# Altium PCB PCB.PcbDoc (part 1 of 2)
Units mm, origin at the board's own origin, x right, y up, seen from the top; angles counter-clockwise.
Board outline 152.4 x 101.6 mm, 4 copper layers (Top Layer, Int1 (GND), Int2 (PWR), Bottom Layer), stack 0.726 mm thick; 112 components, 91 nets, 356 pads, 55 vias.
Unrouted connection lines stored in the file: 46.
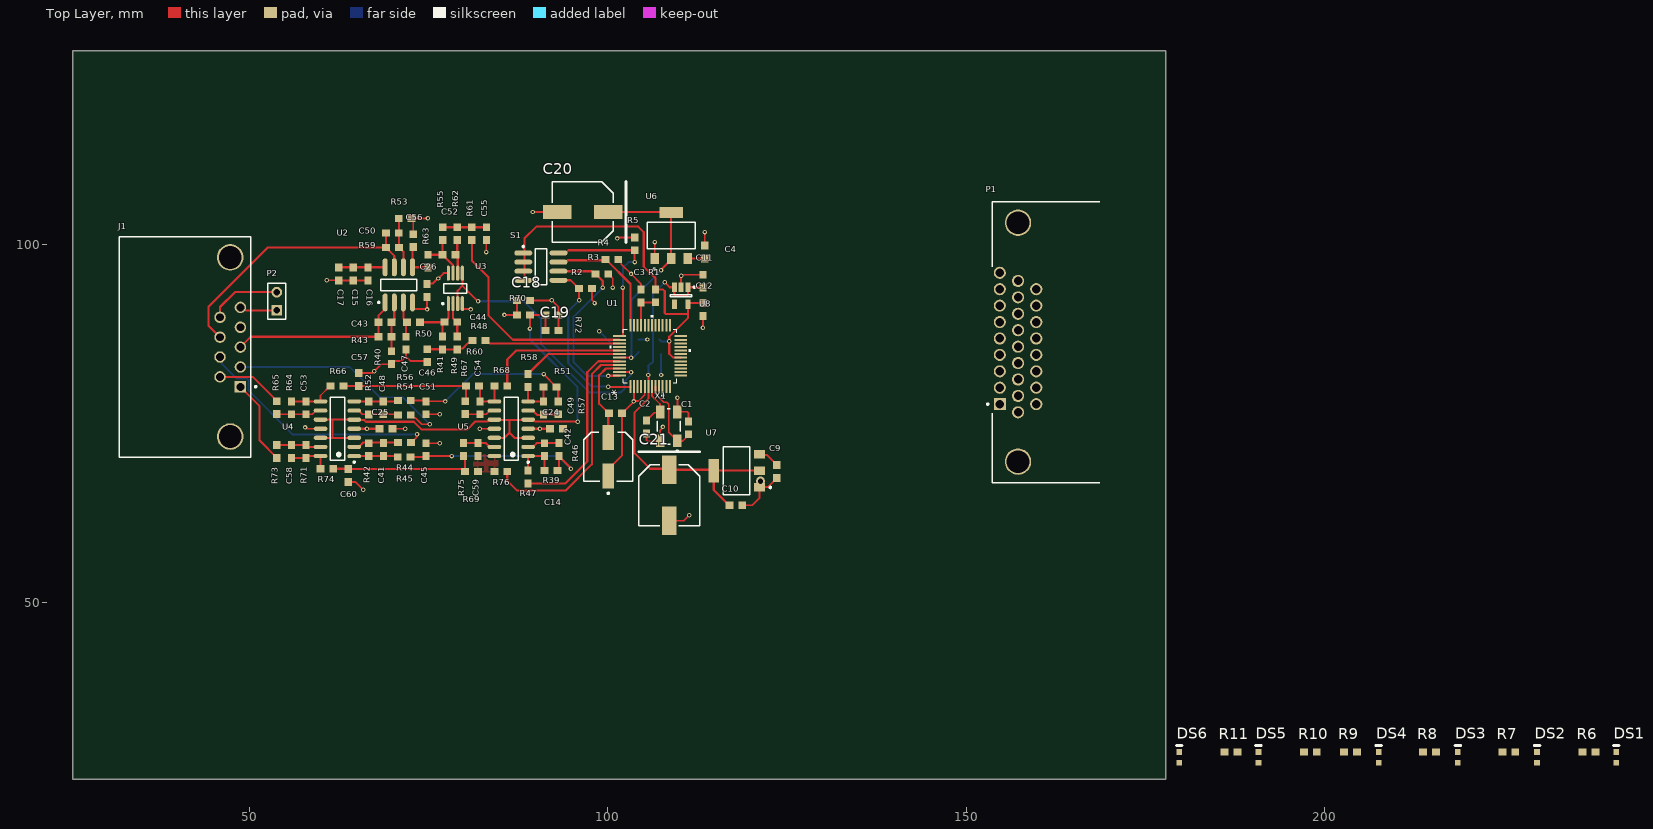
[diagram p0: Top Layer view]
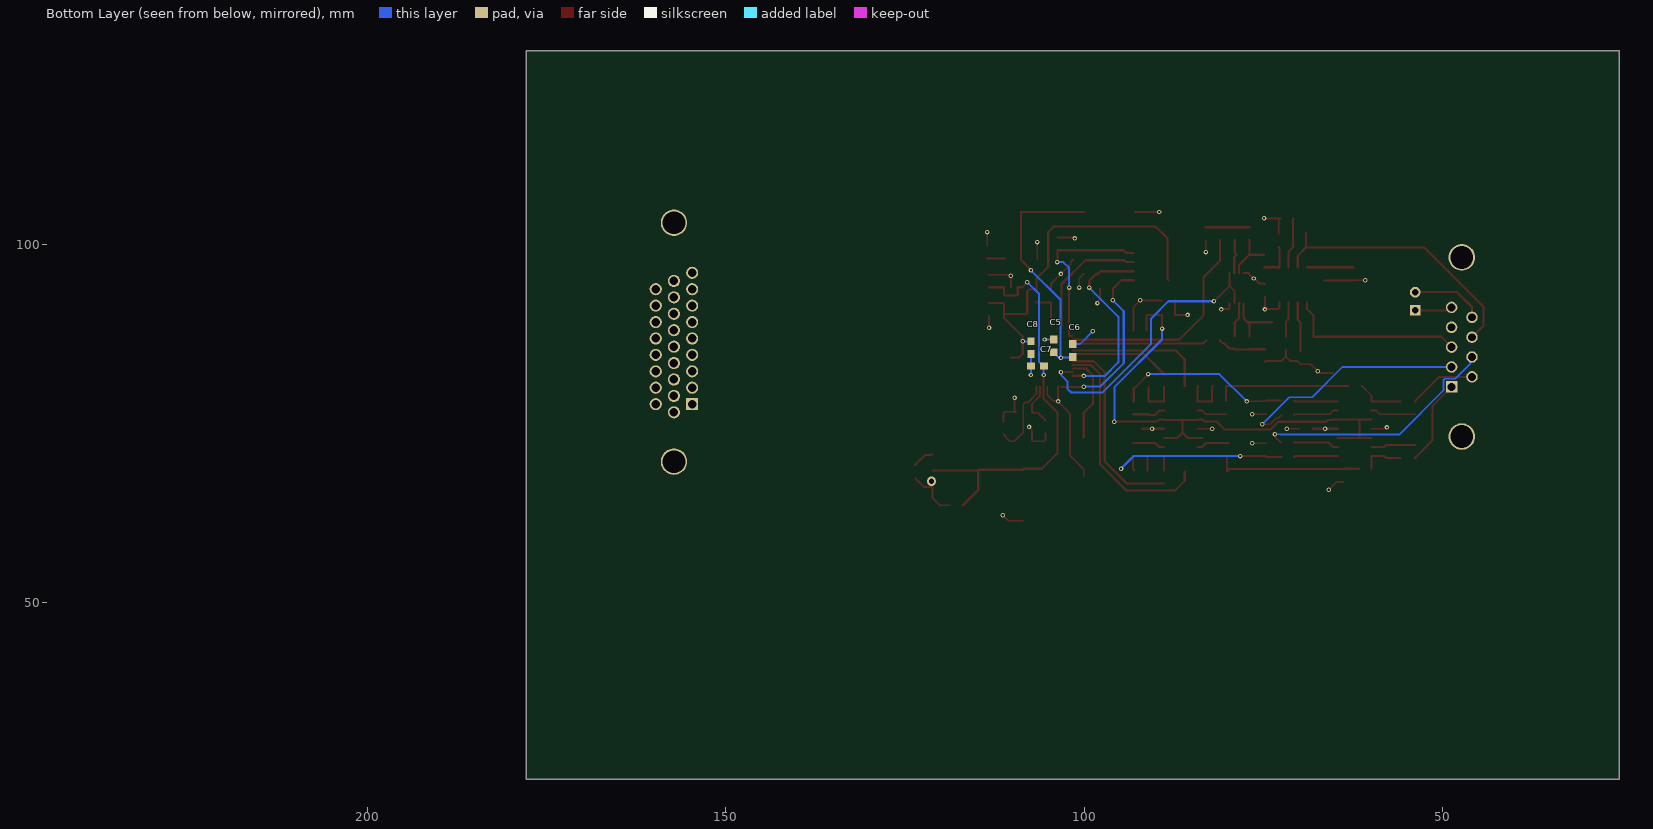
[diagram p1: Bottom Layer view, seen from below]
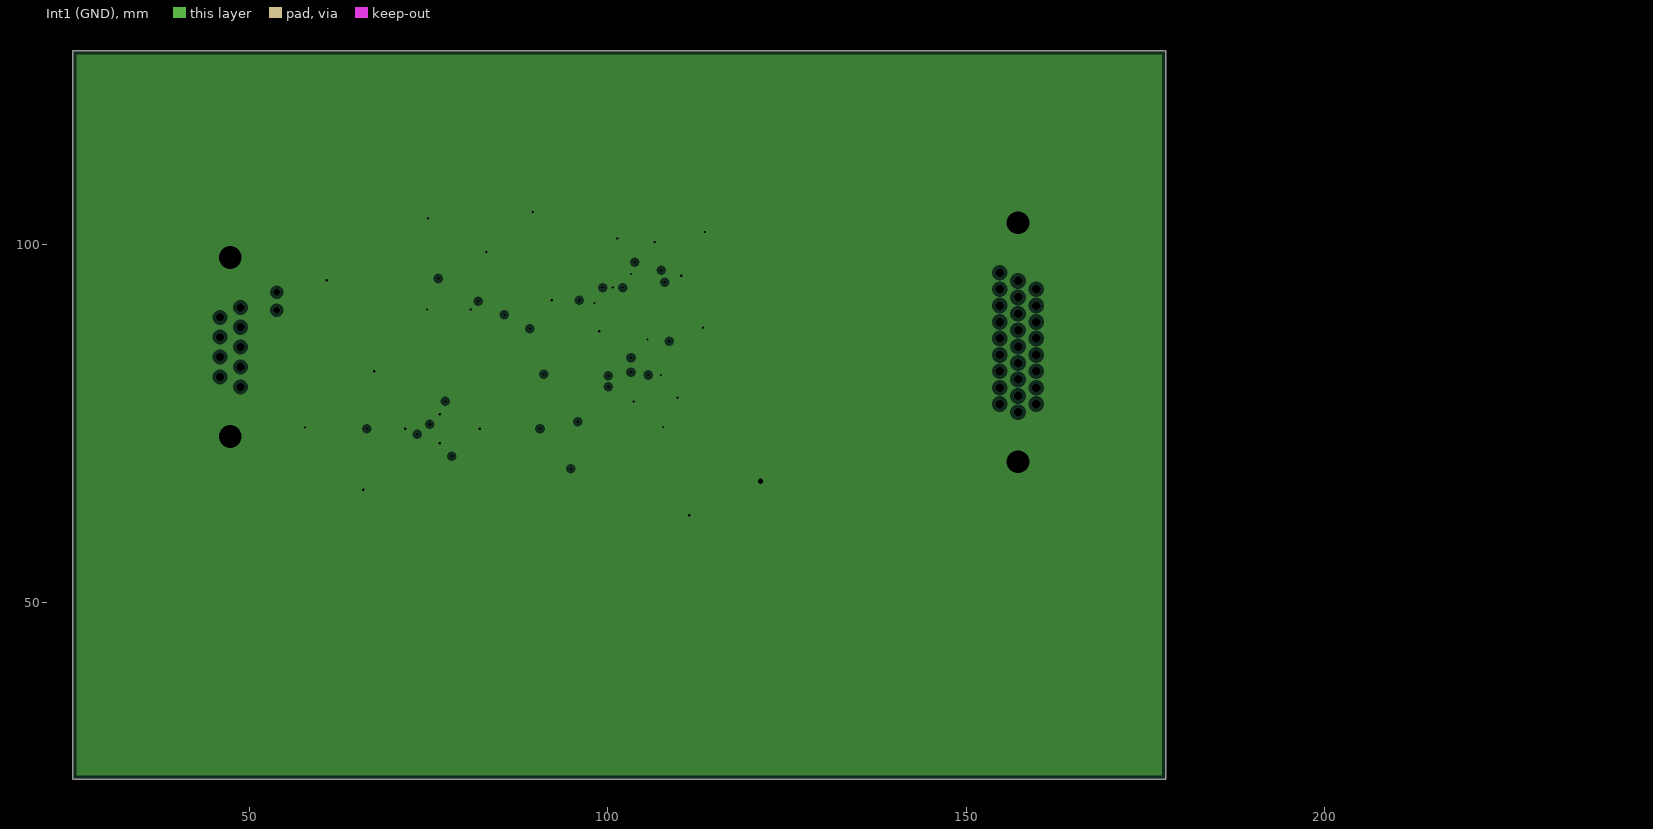
[diagram p2: Int1 (GND), clearances drawn from the general rule]
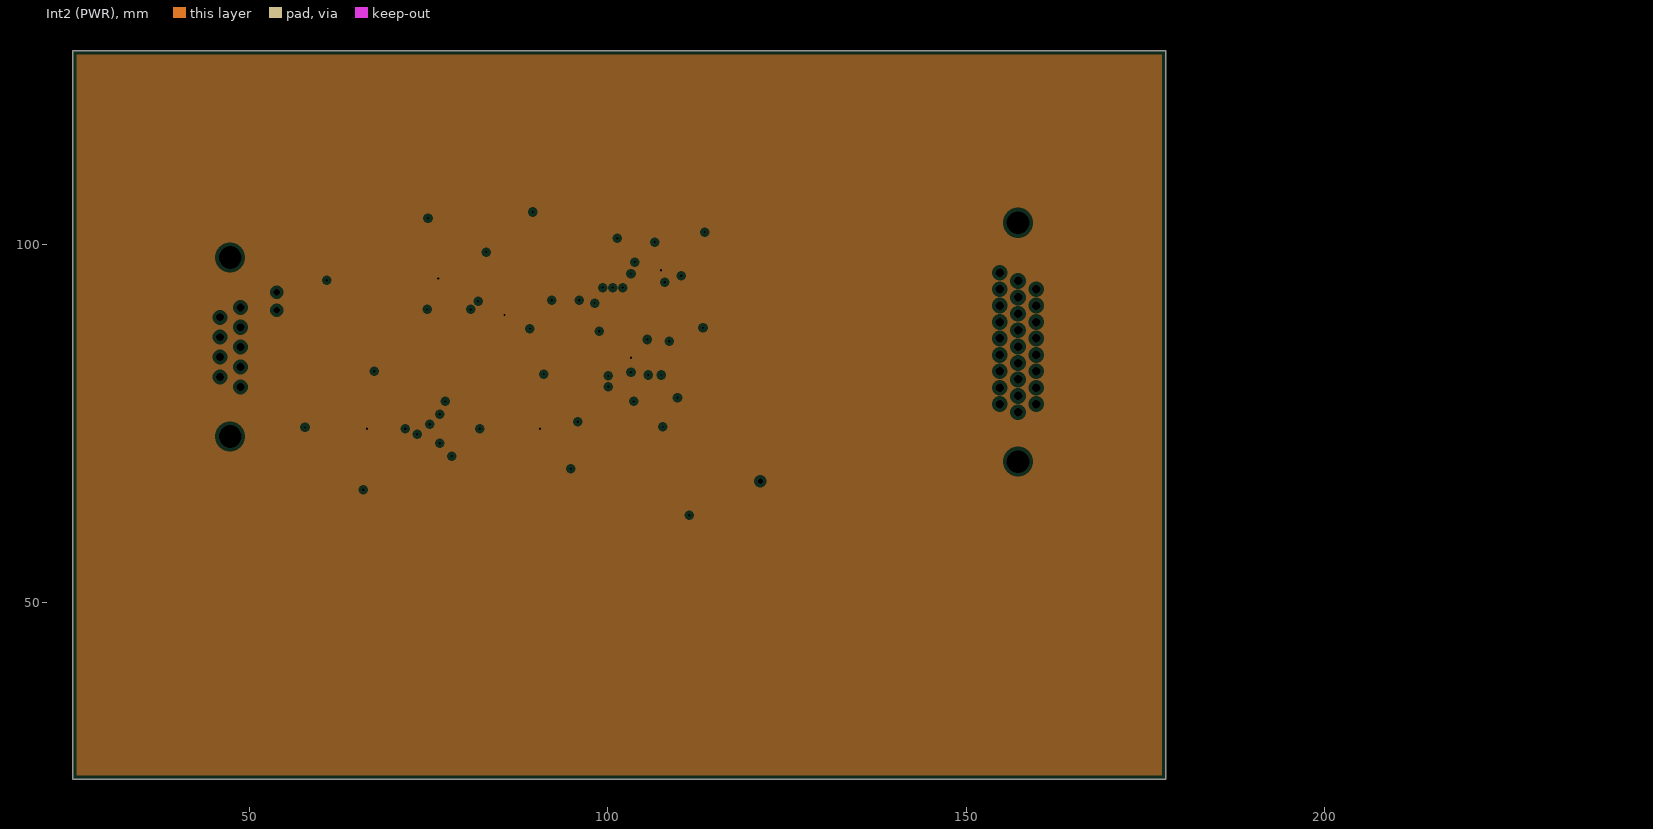
[diagram p3: Int2 (PWR), clearances drawn from the general rule]

## Layer stack, top to bottom
Top Solder: solder mask 0.0254, SM-001, Dk 4
Top Layer: signal copper 0.035
Dielectric 1: prepreg 0.1295, PP-017, Dk 4.3
Dielectric 2: prepreg 0.1295, PP-017, Dk 4.3
Int1 (GND): plane copper 0.018, net GND
Dielectric 3: core 0.1016, Core-009, Dk 4.5
Int2 (PWR): plane copper 0.018, net +5VA
Dielectric 4: prepreg 0.1295, PP-017, Dk 4.3
Dielectric 5: prepreg 0.1295, PP-017, Dk 4.3
Bottom Layer: signal copper 0.035
Bottom Solder: solder mask 0.0254, SM-001, Dk 4

## Board outline
25.4,25.4 177.8,25.4 177.8,127 25.4,127

## Design rules (kind name [scope] priority, off if disabled: settings)
Clearance [All] p1: gap=0.254 ignorepadtopadclearanceinfootprint=FALSE except(0.127: Arc-Arc Arc-Track Arc-SMDPad Track-Track Track-SMDPad SMDPad-SMDPad; 0.2: Arc-THPad Track-THPad; 0.33: Arc-Hole Track-Hole SMDPad-THPad; 0.5: THPad-THPad Via-Hole)
HoleSize [All] p1: absolutevalues=TRUE maxlimit=6.3 minlimit=0.254 maxpercent=80.000 minpercent=20.000
MinimumAnnularRing [All] p1: minimumring=0.254
PlaneClearance [All] p1: clearance=0.508
PlaneConnect [All] p1: planeconnectstyle=Relief reliefexpansion=0.508 reliefentries=4 reliefconductorwidth=0.254 reliefairgap=0.254
PolygonConnect [All] p1: connectstyle=Relief reliefconductorwidth=0.254 reliefentries=4 polygonreliefangle="90 Angle" airgapwidth=0.254
RoutingVias [All] p1: holewidth=0.32 width=0.62 viastyle="Through Hole" minholewidth=0.254 minwidth=0.5 maxholewidth=1 maxwidth=6
SolderMaskExpansion [All] p1: expansion=0.102 istentingtop=FALSE
UnRoutedNet [All] p1: checkbadconnections=TRUE
Width [All] p1: maxlimit=1 minlimit=0.254 preferedwidth=0.5 minimp=50.000000 maximp=50.000000 favimp=50.000000
26 further rules are at their usual default settings.

## Classes and differential pairs
component class U_Power: C4 C5 C6 C7 C8 C9 C10 C11 C12 C20 C21 U6 U7 U8
component class Main: C1 C2 C3 C13 C14 DS1 DS2 DS3 DS4 DS5 DS6 J1 P1 P2 R1 R2 R3 R4 R5 R6 R7 R8 R9 R10 R11 S1 U1 X1
component class Filter: C15 C16 C17 C18 C19 C24 C25 C26 C41 C42 C43 C44 C45 C46 C47 C48 C49 C50 C51 C52 C53 C54 C55 C56 C57 C58 C59 C60 R39 R40 R41 R42 R43 R44 R45 R46 R47 R48 R49 R50 R51 R52 R53 R54 R55 R56 R57 R58 R59 R60 R61 R62 R63 R64 R65 R66 R67 R68 R69 R70 R71 R72 R73 R74 R75 R76 U2 U3 U4 U5

## Components (designator, comment, footprint, x,y, rotation, side; value= is the part's Value field where it differs from the comment)
C1 "Cap SMD" "C0603 (1608)" 111.252,74.422 r270 top value=18pF
C2 "Cap SMD" "C0603 (1608)" 105.41,74.549 r90 top value=18pF
C3 "Cap SMD" "C0603 (1608)" 104.648,92.826 r270 top value=100nF
C4 "Cap SMD" "C0603 (1608)" 113.538,98.933 r270 top value=100nF
C5 "Cap SMD" "C0603 (1608)" 104.267,85.863 r270 bottom value=100nF
C6 "Cap SMD" "C0603 (1608)" 101.6,85.217 r270 bottom value=1uF
C7 "Cap SMD" "C0603 (1608)" 106.542,83.058 r180 bottom value=100nF
C8 "Cap SMD" "C0603 (1608)" 107.442,85.598 r90 bottom value=100nF
C9 "Cap SMD" "C0603 (1608)" 123.571,68.326 r90 top value=100nF
C10 "Cap SMD" "C0603 (1608)" 117.867,63.627 r180 top value=100nF
C11 "Cap SMD" "C0603 (1608)" 113.284,94.869 r270 top value=100nF
C12 "Cap SMD" "C0603 (1608)" 113.284,90.943 r90 top value=100nF
C13 "Cap SMD" "C0603 (1608)" 101.081,76.454 r180 top value=10nF
C14 "UUT1H100MCL1GS" FP-UUT1H100MCL1GS-MFG 100.076,70.391 r90 top
C15 "Cap SMD" "C0603 (1608)" 64.516,95.885 r90 top value=10nF
C16 "Cap SMD" "C0603 (1608)" 66.548,95.885 r90 top value=100nF
C17 "Cap SMD" "C0603 (1608)" 62.484,95.885 r90 top value=1uF
C18 "Cap SMD" "C0603 (1608)" 88.254,92.202 r180 top value=100nF
C19 "Cap SMD" "C0603 (1608)" 92.213,88.011 r180 top value=100nF
C20 "EEEFK1C471P" PNSC-FK-V-F_V 96.52,104.521 r180 top
C21 "EEEFK1C471P" PNSC-FK-V-F_V 108.585,65.03 r270 top
C24 "Cap SMD" "C0603 (1608)" 92.837,74.295 r180 top value=10nF
C25 "Cap SMD" "C0603 (1608)" 69.088,74.295 r180 top value=10nF
C26 "Cap SMD" "C0603 (1608)" 74.803,93.588 r90 top value=10nF
C41 "Cap SMD" "C0603 (1608)" 68.707,71.385 r90 top value=100pF
C42 "Cap SMD" "C0603 (1608)" 91.186,71.374 r90 top value=680pF
C43 "Cap SMD" "C0603 (1608)" 68.95,89.154 r0 top value=2.7nF
C44 "Cap SMD" "C0603 (1608)" 78.116,89.173 r0 top value=56pF
C45 "Cap SMD" "C0603 (1608)" 74.676,71.374 r90 top value=3.9nF
C46 "Cap SMD" "C0603 (1608)" 74.825,84.485 r90 top value=470pF
C47 "Cap SMD" "C0603 (1608)" 71.882,86.222 r270 top value=10nF
C48 "Cap SMD" "C0603 (1608)" 68.689,77.209 r270 top value=100pF
C49 "Cap SMD" "C0603 (1608)" 91.059,77.205 r270 top value=680pF
C50 "Cap SMD" "C0603 (1608)" 69.955,101.6 r0 top value=2.7nF
C51 "Cap SMD" "C0603 (1608)" 74.676,77.216 r270 top value=3.9nF
C52 "Cap SMD" "C0603 (1608)" 77.862,98.571 r0 top value=56pF
C53 "Cap SMD" "C0603 (1608)" 57.912,77.216 r270 top value=100pF
C54 "Cap SMD" "C0603 (1608)" 82.169,77.216 r270 top value=680pF
C55 "Cap SMD" "C0603 (1608)" 83.08,101.492 r90 top value=470pF
C56 "Cap SMD" "C0603 (1608)" 72.882,100.518 r270 top value=10nF
C57 "Cap SMD" "C0603 (1608)" 65.278,81.153 r90 top value=3.9nF
C58 "Cap SMD" "C0603 (1608)" 55.88,71.12 r90 top value=100pF
C59 "Cap SMD" "C0603 (1608)" 81.915,71.385 r90 top value=680pF
C60 "Cap SMD" "C0603 (1608)" 63.816,67.755 r270 top value=3.9nF
DS1 "HSMS-C190" AVAG-HSMX-C190_V 240.665,28.448 r90 top
DS2 "HSMS-C190" AVAG-HSMX-C190_V 229.616,28.448 r90 top
DS3 "HSMS-C190" AVAG-HSMX-C190_V 218.567,28.448 r90 top
DS4 "HSMS-C190" AVAG-HSMX-C190_V 207.518,28.448 r90 top
DS5 "HSMS-C190" AVAG-HSMX-C190_V 190.754,28.448 r90 top
DS6 "HSMS-C190" AVAG-HSMX-C190_V 179.705,28.448 r90 top
J1 "1734354-2" TECO-1734354-2_V 47.348,85.702 r270 top
P1 "5749769-1" TECO-5749769-1_V 157.226,86.364 r90 top
P2 "Header 2" HDR1X2 53.848,90.805 r90 top
R1 "Res" "R0603 (1608)" 106.68,92.837 r90 top
R2 "Res" "R0603 (1608)" 96.901,93.853 r180 top
R3 "Res" "R0603 (1608)" 99.176,95.885 r180 top
R4 "Res" "R0603 (1608)" 100.573,97.917 r180 top
R5 "Res" "R0603 (1608)" 103.759,100.087 r270 top
R6 "1K" "R0603 (1608)" 236.855,29.21 r0 top
R7 "1K" "R0603 (1608)" 225.679,29.21 r0 top
R8 "1K" "R0603 (1608)" 214.63,29.21 r0 top
R9 "1K" "R0603 (1608)" 203.581,29.21 r0 top
R10 "1K" "R0603 (1608)" 197.993,29.21 r0 top
R11 "1K" "R0603 (1608)" 186.944,29.21 r0 top
R39 "Res" "R0603 (1608)" 92.075,68.453 r180 top value=10K
R40 "Res" "R0603 (1608)" 69.85,84.201 r270 top value=10K
R41 "Res" "R0603 (1608)" 76.973,86.263 r90 top value=10K
R42 "Res" "R0603 (1608)" 66.675,71.374 r270 top value=10K
R43 "Res" "R0603 (1608)" 68.95,87.122 r180 top value=10K
R44 "Res" "R0603 (1608)" 71.639,72.39 r180 top value=10K
R45 "Res" "R0603 (1608)" 71.617,70.358 r0 top value=4.3K
R46 "Res" "R0603 (1608)" 93.218,71.385 r90 top value=1.2K
R47 "Res" "R0603 (1608)" 88.9,67.575 r270 top value=10K
R48 "Res" "R0603 (1608)" 82.042,86.614 r180 top value=10K
R49 "Res" "R0603 (1608)" 79.005,86.263 r90 top value=10K
R50 "Res" "R0603 (1608)" 72.898,89.154 r180 top value=10K
R51 "Res" "R0603 (1608)" 91.937,80.137 r180 top value=10K
R52 "Res" "R0603 (1608)" 66.675,77.205 r90 top value=10K
R53 "Res" "R0603 (1608)" 71.755,103.632 r0 top value=10K
R54 "Res" "R0603 (1608)" 71.628,76.2 r180 top value=10K
R55 "Res" "R0603 (1608)" 76.984,101.492 r270 top value=10K
R56 "Res" "R0603 (1608)" 71.628,78.211 r0 top value=4.3K
R57 "Res" "R0603 (1608)" 93.091,77.216 r270 top value=1.2K
R58 "Res" "R0603 (1608)" 88.9,81.037 r90 top value=10K
R59 "Res" "R0603 (1608)" 69.966,99.568 r180 top value=10K
R60 "Res" "R0603 (1608)" 81.153,80.264 r0 top value=10K
R61 "Res" "R0603 (1608)" 81.048,101.503 r90 top value=10K
R62 "Res" "R0603 (1608)" 79.016,101.492 r270 top value=10K
R63 "Res" "R0603 (1608)" 74.93,97.663 r270 top value=10K
R64 "Res" "R0603 (1608)" 55.88,77.216 r90 top value=10K
R65 "Res" "R0603 (1608)" 53.848,77.227 r270 top value=10K
R66 "Res" "R0603 (1608)" 62.23,80.264 r0 top value=4.3K
R67 "Res" "R0603 (1608)" 80.137,77.227 r270 top value=1.2K
R68 "Res" "R0603 (1608)" 85.09,80.264 r0 top value=10K
R69 "Res" "R0603 (1608)" 81.015,68.326 r0 top value=10K
R70 "Res" "R0603 (1608)" 88.265,90.17 r180 top value=10K
R71 "Res" "R0603 (1608)" 57.912,71.131 r270 top value=10K
R72 "Res" "R0603 (1608)" 92.213,90.17 r180 top value=10K
R73 "Res" "R0603 (1608)" 53.848,71.109 r90 top value=10K
R74 "Res" "R0603 (1608)" 60.822,68.707 r0 top value=4.3K
R75 "Res" "R0603 (1608)" 79.883,71.385 r90 top value=1.2K
R76 "Res" "R0603 (1608)" 85.09,68.326 r0 top value=10K
S1 "SW DIP-4" SO8_M 90.678,96.901 r0 top
U1 "AD2S1210ASTZ" ST_48_ADI-M 105.918,84.455 r90 top
U2 "AD8397ARZ" ADI-R-8_M 70.866,94.361 r90 top
U3 "AD8692ARMZ-R7" ADI-RM-8_M 78.751,93.872 r90 top
U4 "AD8694ARZ" ADI-R-14_L 62.294,74.295 r180 top
U5 "AD8694ARZ" ADI-R-14_L 86.551,74.295 r180 top
U6 "LDL1117S50R" FP-SOT-223-0046067_14-MFG 108.839,101.244 r90 top
U7 "LDL1117S50R" FP-SOT-223-0046067_14-MFG 117.983,68.453 r180 top
U8 "LD39015M33R" SOT23-5L_M 110.236,92.837 r270 top
X1 "ABM3B-8.000MHZ-10-1-U-T" ABRA-ABM3B_V 108.506,74.617 r90 top

## Footprints (in the part's own frame and the unit in brackets; to place one, negate y for a bottom-side part, rotate by r counter-clockwise, add the part's x,y. Pads: shape width x height; smd on the part's side, far side on the other; paste and mask are expansions set on the pad)
ABRA-ABM3B_V [mm] "SMD, 4-Leads, Body 5x3.2mm"
  rect 1.8x1.2 smd: 1(-2,-1.2) 2(2,-1.2) 3(2,1.2) 4(-2,1.2)
  silkscreen extent -3.57,-1.6 2.5,1.6, body extent -2.5,-1.59 2.5,1.59, height 1.13
ADI-R-8_M [mm] "SOIC, 8-Leads, Body 4.9x3.9mm, Pitch 1.27mm, IPC Low Density"
  oval 2.5x0.7 smd: 1(-2.45,1.905) 2(-2.45,0.635) 3(-2.45,-0.635) 4(-2.45,-1.905) 5(2.45,-1.905) 6(2.45,-0.635) 7(2.45,0.635) 8(2.45,1.905)
  silkscreen extent -2.57,-2.5 0.8,2.93, body extent -2,-2.5 2,2.5, height 1.75
ADI-R-14_L [mm] "SOIC, 14-Leads, Body 8.65x3.9mm, Pitch 1.27mm, IPC High Density"
  oval 1.9x0.6 smd: 1(-2.35,3.81) 2(-2.35,2.54) 3(-2.35,1.27) 4(-2.35,0) 5(-2.35,-1.27) 6(-2.35,-2.54) 7(-2.35,-3.81) 8(2.35,-3.81) 9(2.35,-2.54) 10(2.35,-1.27) 11(2.35,0) 12(2.35,1.27) 13(2.35,2.54) 14(2.35,3.81)
  silkscreen extent -2.48,-4.4 1,4.78, body extent -2,-4.4 2,4.4, height 1.75
ADI-RM-8_M [mm] "SOP, 8-Leads, Body 3x3mm, Pitch 0.65mm, IPC Low Density"
  oval 2.1x0.45 smd: 1(-2.125,0.975) 2(-2.125,0.325) 3(-2.125,-0.325) 4(-2.125,-0.975) 5(2.125,-0.975) 6(2.125,-0.325) 7(2.125,0.325) 8(2.125,0.975)
  silkscreen extent -2.25,-1.6 0.67,1.87, body extent -1.6,-1.6 1.6,1.6, height 1.1
AVAG-HSMX-C190_V [mm] "SMD, 2-Leads, Body 1.6x0.8mm, Height 0.9mm"
  rect 0.8x0.8 smd: 1(-0.75,0) 2(0.75,0)
  silkscreen extent 1.65,-0.4 1.65,0.4, body extent -0.8,-0.4 0.8,0.4, height 0.9
"C0603 (1608)" [mm] "Chip Capacitor, 2-Leads, Body 1,60x0,81mm, IPC Low Density"
  rect 1.1x1 smd: 1(-0.9,0) 2(0.9,0)
  body extent -0.8,-0.41 0.8,0.42, height 0.79
FP-SOT-223-0046067_14-MFG [mm]
  rect 1.5x1.2 smd paste+0 mask+0: 1(-3.2,2.3) 2(-3.2,0) 3(-3.2,-2.3)
  rect 1.5x3.3 smd paste+0 mask+0: 4(3.2,0)
  silkscreen extent -4.82,-3.35 1.85,3.35, body extent -4.05,-3.45 4.05,3.45, height 0.25
FP-UUT1H100MCL1GS-MFG [mm]
  rect 3.5x1.6 smd paste+0 mask+0: 1(-2.7,0) 2(2.7,0)
  silkscreen extent -5.22,-3.4 3.4,3.4, body extent -4.7,-3.65 4.7,3.65, height 0.25
HDR1X2 [mm] "Connector; Header; 2 Position"
  rect 1.5x1.5 hole 0.9: 1(0,0)
  round 1.5 hole 0.9: 2(2.54,0)
  silkscreen extent -1.27,-1.27 3.81,1.27
PNSC-FK-V-F_V [mm] "CAPAE, 2-Leads, Body 8.50x8.50mm"
  rect 4x2 smd: 1(-3.55,0) 2(3.55,0)
  silkscreen extent -6.05,-4.25 4.25,4.25, body extent -5,-4.25 5,4.25, height 10.5
"R0603 (1608)" [mm]
  rect 1.1x1 smd: 1(-0.9,0) 2(0.9,0)
  body extent -0.8,-0.42 0.8,0.38, height 0.45
SO8_M [mm] "SOIC, 8-Leads, Body 4.9x3.9mm, Pitch 1.27mm, IPC Low Density"
  oval 2.5x0.7 smd: 1(-2.45,1.905) 2(-2.45,0.635) 3(-2.45,-0.635) 4(-2.45,-1.905) 5(2.45,-1.905) 6(2.45,-0.635) 7(2.45,0.635) 8(2.45,1.905)
  silkscreen extent -2.57,-2.5 0.8,2.93, body extent -2,-2.5 2,2.5, height 1.75
SOT23-5L_M [mm] "SOT23, 5-Leads, Body 2.9x1.6mm, Pitch 0.95mm, Lead Span 2.8mm, IPC Low Density"
  rect 1.3x0.7 smd: 1(-1.2,0.95) 2(-1.2,0) 3(-1.2,-0.95) 4(1.2,-0.95) 5(1.2,0.95)
  silkscreen extent -1.32,-1.5 0.15,1.98, body extent -0.87,-1.5 0.87,1.5, height 1.45
ST_48_ADI-M [mm]
  rect 1.762x0.279 smd paste+0 mask+0: 1(-4.266,2.75) 2(-4.266,2.25) 3(-4.266,1.75) 4(-4.266,1.25) 5(-4.266,0.75) 6(-4.266,0.25) 7(-4.266,-0.25) 8(-4.266,-0.75) 9(-4.266,-1.25) 10(-4.266,-1.75) 11(-4.266,-2.25) 12(-4.266,-2.75) 25(4.266,-2.75) 26(4.266,-2.25) 27(4.266,-1.75) 28(4.266,-1.25) 29(4.266,-0.75) 30(4.266,-0.25) 31(4.266,0.25) 32(4.266,0.75) 33(4.266,1.25) 34(4.266,1.75) 35(4.266,2.25) 36(4.266,2.75)
  rect 0.279x1.762 smd paste+0 mask+0: 13(-2.75,-4.266) 14(-2.25,-4.266) 15(-1.75,-4.266) 16(-1.25,-4.266) 17(-0.75,-4.266) 18(-0.25,-4.266) 19(0.25,-4.266) 20(0.75,-4.266) 21(1.25,-4.266) 22(1.75,-4.266) 23(2.25,-4.266) 24(2.75,-4.266) 37(2.75,4.266) 38(2.25,4.266) 39(1.75,4.266) 40(1.25,4.266) 41(0.75,4.266) 42(0.25,4.266) 43(-0.25,4.266) 44(-0.75,4.266) 45(-1.25,4.266) 46(-1.75,4.266) 47(-2.25,4.266) 48(-2.75,4.266)
  silkscreen extent -5.66,-5.66 5.66,5.66, body extent -4.6,-4.6 4.6,4.6, height 1.6
TECO-1734354-2_V [mm] "Connector, Body 30.8x18.4mm, Pitch 2.77mm"
  rect 1.6x1.6 hole 1.09: 1(5.565,1.42)
  round 1.6 hole 1.09: 2(2.795,1.42) 3(0.025,1.42) 4(-2.745,1.42) 5(-5.515,1.42) 6(4.18,-1.42) 7(1.41,-1.42) 8(-1.36,-1.42) 9(-4.13,-1.42)
  round 3.7 hole 3.18: MH1(12.495,0) MH2(-12.495,0)
  silkscreen extent -15.4,-15.5 15.4,3.68, body extent -15.4,-15.52 15.4,2.9, height 12.5
TECO-5749769-1_V [mm] "THD, 26-Leads, Body 39.2x21.06mm, Pitch 2.29mm"
  rect 1.69x1.69 hole 1.19: 1(-8.64,2.54)
  round 1.69 hole 1.19: 2(-6.35,2.54) 3(-4.06,2.54) 4(-1.77,2.54) 5(0.52,2.54) 6(2.81,2.54) 7(5.1,2.54) 8(7.39,2.54) 9(9.68,2.54) 10(-9.78,0) 11(-7.49,0) 12(-5.2,0) 13(-2.91,0) 14(-0.62,0) 15(1.67,0) 16(3.96,0) 17(6.25,0) 18(8.54,0) 19(-8.64,-2.54) 20(-6.35,-2.54) 21(-4.06,-2.54) 22(-1.77,-2.54) 23(0.52,-2.54) 24(2.81,-2.54) 25(5.1,-2.54) 26(7.39,-2.54)
  round 3.68 hole 3.18: MH1(-16.66,0) MH2(16.66,0)
  silkscreen extent -19.6,-11.43 19.6,4.35, body extent -19.6,-17.43 19.6,3.63, height 12.5

## Part data
C13 C15 C24 C25 C26 C47 C56: "Multilayer Ceramic Capacitors MLCC - SMD/SMT 2200pF 50Volts 2%", Capacitance=2.2nF, Case Code (Imperial)=0603, Case Code (Metric)=1608, Dielectric=C0G, Manufacturer=Murata, Manufacturer Part Number=GRM1885C1H222GA01D, Max Operating Temperature=125°C, Min Operating Temperature=-55°C, Package Quantity=4000, Supplier Part Number 1=490-6381-2-ND, Tolerance=2%, Voltage=50V, Case/Package=0603, Category="Ceramic Capacitors", ComponentLink1Description=https://datasheet.ciiva.com/11620/c02e-11620874.pdf?src-supplier=Avnet, ComponentLink1URL=https://datasheet.ciiva.com/11620/c02e-11620874.pdf?src-supplier=Avnet, ComponentLink2Description=https://datasheet.ciiva.com/5426/c02e-5426991.pdf?src-supplier=Mouser, ComponentLink2URL=https://datasheet.ciiva.com/5426/c02e-5426991.pdf?src-supplier=Mouser, ComponentLink3Description=https://datasheet.ciiva.com/6264/partnumbering-e-01-6264223.pdf?src-supplier=Digi-Key, ComponentLink3URL=https://datasheet.ciiva.com/6264/partnumbering-e-01-6264223.pdf?src-supplier=Digi-Key, Construction=Flat, Depth=0.8mm, Height=0.8mm, Lead Free="Lead Free", Length=1.6mm, Mount="Surface Mount", Packaging="Tape and Reel", Pricing 1="4000=0,03542 (USD)", Radiation Hardening=No, RoHS=Yes, RoHS Compliant=Yes, Series=GRM, Stock 1=28000, Supplier 1=Digi-Key, Termination=SMD/SMT, Thickness=0.035inch, Voltage Rating=50V, Voltage Rating (DC)=50V, Width=0.031inch
C14: library part CMP-12462-000014-1, "CAP ALUM 10UF 20% 50V SMD", Capacitance=10uF, Case/Package=SMD/SMT, Dielectric Material=Aluminium, Leakage Current=3uA, Max Operating Temperature=105°C, Min Operating Temperature=-55°C, Package Quantity=1, Ripple Current=30mA, Tolerance=20%, Voltage=50V, Diameter=6.3mm, Dissipation Factor=0.12%, Features="General Purpose", Height=5.8mm, Height - Seated (Max)=0.24inch, Lead Diameter=0.8mm, Lead Free="Lead Free", Lead Pitch=2.2mm, Length=5.8mm, Life (Hours)=2000Hour, Mount="Surface Mount", Number of Pins=2, Packaging="Tape and Reel", Radiation Hardening=No, REACH SVHC="No SVHC", Ripple Current (AC)=30mA, Termination=SMD/SMT, Voltage Rating=50V, Voltage Rating (DC)=50V, Width=6.6mm
C20 C21: library part CMP-2000-06204-1, "Aluminum Electrolytic Capacitor, 470 uF, +/- 20%, 16 V, 2-Pin SMD (Size Code F), -55 to 105 degC, RoHS, Tape and Reel", Capacitance=470µF, Case Size/Dimension=Ø8x10.2mm, Lifetime@Temperature=2000Hrs@105°C, Manufacturer=Panasonic, Operating Temp Range=-55to+105°C, Operating Temp-Max=105°C, Package Description="2-Pin Electrolytic Aluminum Capacitor, Body 8.3 x 8.3 mm", Package Reference=FK-V-F, Rated Voltage=16V, Ripple Current=600mA, Datasheet URL=http://industrial.panasonic.com/cdbs/www-data/pdf/RDE0000/ABA0000C1181.pdf, Datasheet Version=03/2016, Impedance=0.16O, Manufacturer URL=http://www.panasonic.com/, Mounting Technology=SurfaceMount, Package URL=http://industrial.panasonic.com/cdbs/www-data/pdf/RDE0000/DME0000COL48.pdf, Series=FK, Type=Can
C41 C48 C53 C58: "Cap Ceramic 100pF 50V C0G 2% Pad SMD 0603 125C T/R", Capacitance=100pF, Case Code (Imperial)=0603, Case Code (Metric)=1608, Dielectric=C0G, Manufacturer=Murata, Manufacturer Part Number=GRM1885C1H101GA01D, Max Operating Temperature=125°C, Min Operating Temperature=-55°C, Package Quantity=4000, Supplier Part Number 1=490-11435-1-ND, Tolerance=2%, Voltage Rating=50V, Case/Package=0603, Category="Ceramic Capacitors", ComponentLink1Description=https://datasheet.ciiva.com/18184/getdatasheetpartid-31878-18184808.pdf?src-supplier=Verical, ComponentLink1URL=https://datasheet.ciiva.com/18184/getdatasheetpartid-31878-18184808.pdf?src-supplier=Verical, ComponentLink2Description=https://datasheet.ciiva.com/166/partnumbering-e-01-166100.pdf?src-supplier=Digi-Key, ComponentLink2URL=https://datasheet.ciiva.com/166/partnumbering-e-01-166100.pdf?src-supplier=Digi-Key, ComponentLink3Description=https://datasheet.ciiva.com/11605/c02e-11605546.pdf?src-supplier=Avnet, ComponentLink3URL=https://datasheet.ciiva.com/11605/c02e-11605546.pdf?src-supplier=Avnet, Construction=Flat, Depth=0.8mm, Height=0.8mm, Lead Free="Lead Free", Length=1.6mm, Mount="Surface Mount", Packaging="Tape and Reel", Pricing 1="1=0,15000, 10=0,11000, 50=0,06240, 100=0,05170, 500=0,03624, 1000=0,03000 (USD)", Radiation Hardening=No, RoHS=Yes, RoHS Compliant=Yes, Series=GRM, Stock 1=2321, Supplier 1=Digi-Key, Termination=SMD/SMT, Thickness=0.035inch, Voltage Rating (DC)=50V, Width=0.031inch
C42 C49 C54 C59: "Cap Ceramic 680pF 100V C0G 5% SMD 0603 125C Paper T/R", Capacitance=680pF, Case Code (Imperial)=0603, Case Code (Metric)=1608, Dielectric=C0G, Manufacturer=Murata, Manufacturer Part Number=GCM1885C2A681JA16D, Max Operating Temperature=125°C, Min Operating Temperature=-55°C, Package Quantity=1, Ratings=AEC-Q200, Supplier Part Number 1=490-4950-1-ND, Tolerance=5%, Voltage Rating=100V, Case/Package=0603, Category="Ceramic Capacitors", ComponentLink1Description=https://datasheet.ciiva.com/134/product-134483.pdf?src-supplier=Digi-Key, ComponentLink1URL=https://datasheet.ciiva.com/134/product-134483.pdf?src-supplier=Digi-Key, ComponentLink2Description=https://datasheet.ciiva.com/134/product-134482.pdf?src-supplier=Digi-Key, ComponentLink2URL=https://datasheet.ciiva.com/134/product-134482.pdf?src-supplier=Digi-Key, ComponentLink3Description=https://datasheet.ciiva.com/134/product-134484.pdf?src-supplier=Digi-Key, ComponentLink3URL=https://datasheet.ciiva.com/134/product-134484.pdf?src-supplier=Digi-Key, ComponentLink4Description=https://datasheet.ciiva.com/11604/product-11604105.pdf?src-supplier=Avnet, ComponentLink4URL=https://datasheet.ciiva.com/11604/product-11604105.pdf?src-supplier=Avnet, Construction=Flat, Depth=0.8mm, Height=0.8mm, Length=1.6mm, Mount="Surface Mount", Packaging="Tape and Reel", Pricing 1="1=0,24000, 10=0,16100, 50=0,09660, 100=0,08150, 500=0,05576, 1000=0,04934 (USD)", Radiation Hardening=No, RoHS=Yes, RoHS Compliant=Yes, Series=GCM, Stock 1=6295, Supplier 1=Digi-Key, Termination=SMD/SMT, Thickness=0.035inch, Voltage Rating (DC)=100V, Width=0.031inch
C43 C50: "Multilayer Ceramic Capacitors MLCC - SMD/SMT 2700pF 50Volts 2%", Capacitance=2.7nF, Case Code (Imperial)=0603, Case Code (Metric)=1608, Dielectric=C0G, Manufacturer=Murata, Manufacturer Part Number=GRM1885C1H272GA01D, Max Operating Temperature=125°C, Min Operating Temperature=-55°C, Package Quantity=1, Supplier Part Number 1=490-6383-2-ND, Tolerance=2%, Voltage Rating=50V, Case/Package=0603, Category="Ceramic Capacitors", ComponentLink1Description=https://datasheet.ciiva.com/5418/c02e-5418951.pdf?src-supplier=Mouser, ComponentLink1URL=https://datasheet.ciiva.com/5418/c02e-5418951.pdf?src-supplier=Mouser, ComponentLink2Description=https://datasheet.ciiva.com/6270/partnumbering-e-01-6270459.pdf?src-supplier=Digi-Key, ComponentLink2URL=https://datasheet.ciiva.com/6270/partnumbering-e-01-6270459.pdf?src-supplier=Digi-Key, ComponentLink3Description=https://datasheet.ciiva.com/6270/partnumbering-e-01-6270461.pdf?src-supplier=Digi-Key, ComponentLink3URL=https://datasheet.ciiva.com/6270/partnumbering-e-01-6270461.pdf?src-supplier=Digi-Key, Depth=0.8mm, Height=0.8mm, Lead Free="Lead Free", Length=1.6mm, Mount="Surface Mount", Packaging="Tape and Reel", Pricing 1="4000=0,04378 (USD)", Radiation Hardening=No, RoHS=Yes, Stock 1=4000, Supplier 1=Digi-Key, Termination=SMD/SMT, Thickness=0.035inch, Voltage Rating (DC)=50V, Width=0.031inch
C44 C52: "Cap Ceramic 56pF 50V C0G 2% SMD 0603 125C Paper T/R", Capacitance=56pF, Case Code (Imperial)=0603, Case Code (Metric)=1608, Dielectric=C0G, Manufacturer=Murata, Manufacturer Part Number=GRM1885C1H560GA01D, Max Operating Temperature=125°C, Min Operating Temperature=-55°C, Package Quantity=4000, Supplier Part Number 1=490-11468-1-ND, Tolerance=2%, Voltage Rating=50V, Case/Package=0603, Category="Ceramic Capacitors", ComponentLink1Description=https://datasheet.ciiva.com/5411/product-5411922.pdf?src-supplier=Mouser, ComponentLink1URL=https://datasheet.ciiva.com/5411/product-5411922.pdf?src-supplier=Mouser, ComponentLink2Description=https://datasheet.ciiva.com/29538/grm1885c1h560ga01-01-29538040.pdf?src-supplier=Digi-Key, ComponentLink2URL=https://datasheet.ciiva.com/29538/grm1885c1h560ga01-01-29538040.pdf?src-supplier=Digi-Key, ComponentLink3Description=https://datasheet.ciiva.com/17451/c02e-17451755.pdf?src-supplier=Avnet+Europe, ComponentLink3URL=https://datasheet.ciiva.com/17451/c02e-17451755.pdf?src-supplier=Avnet+Europe, ComponentLink4Description=https://datasheet.ciiva.com/11606/c02e-11606461.pdf?src-supplier=Avnet, ComponentLink4URL=https://datasheet.ciiva.com/11606/c02e-11606461.pdf?src-supplier=Avnet, Construction=Flat, Depth=0.8mm, Height=0.8mm, Lead Free="Lead Free", Length=1.6mm, Material=Ceramic, Mount="Surface Mount", Packaging="Tape and Reel", Pricing 1="1=0,15000, 10=0,11000, 50=0,06240, 100=0,05170, 500=0,03624, 1000=0,03000 (USD)", Radiation Hardening=No, RoHS=Yes, RoHS Compliant=Yes, Series=GRM, Stock 1=21091, Supplier 1=Digi-Key, Termination=SMD/SMT, Thickness=0.035inch, Voltage Rating (DC)=50V, Width=0.8mm
C45 C51 C57 C60: "Cap Ceramic 0.0039uF 50V C0G 5% SMD 0603 125C Paper T/R", Capacitance=3.9nF, Case Code (Imperial)=0603, Case Code (Metric)=1608, Dielectric=C0G, Manufacturer=Murata, Manufacturer Part Number=GRM1885C1H392JA01D, Max Operating Temperature=125°C, Min Operating Temperature=-55°C, Package Quantity=4000, Temperature Coefficient=30ppm/°C, Tolerance=5%, Voltage=50V, Case/Package=0603, Category="Ceramic Capacitors", ComponentLink1Description=https://datasheet.ciiva.com/11786/0900766b80ef921d-11786656.pdf?src-supplier=RSComponents, ComponentLink1URL=https://datasheet.ciiva.com/11786/0900766b80ef921d-11786656.pdf?src-supplier=RSComponents, ComponentLink2Description=https://datasheet.ciiva.com/6264/product-6264201.pdf?src-supplier=Digi-Key, ComponentLink2URL=https://datasheet.ciiva.com/6264/product-6264201.pdf?src-supplier=Digi-Key, ComponentLink3Description=https://datasheet.ciiva.com/6264/partnumbering-e-01-6264203.pdf?src-supplier=Digi-Key, ComponentLink3URL=https://datasheet.ciiva.com/6264/partnumbering-e-01-6264203.pdf?src-supplier=Digi-Key, ComponentLink4Description=https://datasheet.ciiva.com/6264/partnumbering-e-01-6264206.pdf?src-supplier=Digi-Key, ComponentLink4URL=https://datasheet.ciiva.com/6264/partnumbering-e-01-6264206.pdf?src-supplier=Digi-Key, Construction=Flat, Depth=0.8mm, Height=0.8mm, Lead Free="Lead Free", Length=1.6mm, Material=Ceramic, Mount="Surface Mount", Packaging="Tape and Reel", Pricing 1="4000=0,01991, 8000=0,01945, 16000=0,01918, 24000=0,01863, 32000=0,01822 (USD)", Radiation Hardening=No, RoHS=Yes, RoHS Compliant=Yes, Series=GRM, Stock 1=36000, Supplier 1=Avnet, Supplier Part Number 1=GRM1885C1H392JA01D, Termination=SMD/SMT, Thickness=0.035inch, Voltage Rating=50V, Voltage Rating (DC)=50V, Width=0.031inch
C46 C55: "Multilayer Ceramic Capacitors MLCC - SMD/SMT 0603 470pF 50volts C0G 2%", Capacitance=470pF, Case Code (Imperial)=0603, Case Code (Metric)=1608, Dielectric=C0G, Manufacturer=Murata, Manufacturer Part Number=GRM1885C1H471GA01D, Max Operating Temperature=125°C, Min Operating Temperature=-55°C, Package Quantity=4000, Supplier Part Number 1=490-11465-1-ND, Tolerance=2%, Voltage Rating=50V, Case/Package=0603, Category="Ceramic Capacitors", ComponentLink1Description=https://datasheet.ciiva.com/29537/grm1885c1h471ga01-01-29537943.pdf?src-supplier=Digi-Key, ComponentLink1URL=https://datasheet.ciiva.com/29537/grm1885c1h471ga01-01-29537943.pdf?src-supplier=Digi-Key, ComponentLink2Description=https://datasheet.ciiva.com/5411/product-5411517.pdf?src-supplier=Mouser, ComponentLink2URL=https://datasheet.ciiva.com/5411/product-5411517.pdf?src-supplier=Mouser, ComponentLink3Description=https://datasheet.ciiva.com/11604/c02e-11604845.pdf?src-supplier=Avnet, ComponentLink3URL=https://datasheet.ciiva.com/11604/c02e-11604845.pdf?src-supplier=Avnet, Construction=Flat, Depth=0.8mm, Height=0.8mm, Length=1.6mm, Mount="Surface Mount", Packaging="Tape and Reel", Pricing 1="1=0,20000, 10=0,14000, 50=0,07960, 100=0,06600, 500=0,04630, 1000=0,03833 (USD)", Radiation Hardening=No, RoHS=Yes, RoHS Compliant=Yes, Series=GRM, Stock 1=136339, Supplier 1=Digi-Key, Termination=SMD/SMT, Thickness=0.035inch, Voltage Rating (DC)=50V, Width=0.031inch
DS1 DS2 DS3 DS4 DS5 DS6: library part CMP-2000-06427-1, "LED Uni-Color Red, 52 mW, 20 mA, -40 to 85 degC, 2-Pin SMD, RoHS, Tape and Reel", Emitting Color=Red, Forward Current=25mA, Forward Voltage=2.6V, Manufacturer=Avago, Operating Temp Range=-40Cto85C, Operating Temperature Classification=Industrial, Package Description="2-Pin Surface Mount Device, Body 1.6 x 0.8 mm, Height 0.9 mm", Package Reference=HSMX-C190, Package Type=ChipLed, Power Dissipation=52W, Reverse Voltage=5V, Test Current (It)=20mA, Chip Material=GaP, Datasheet URL=http://docs.avagotech.com/docs/AV02-0551EN, Datasheet Version=03/2012, DELETED=Compliant, Dominant Wave Length=626nm, High Brightness=No, Lens Dimensions=1x0.8x0.5mm, Lens Type=ColorlessDiffused, Lum Intensity=10mcd, Luminous Intensity=10mcd, Main Category=ChipLED, Manufacturer URL=http://www.avagotech.com/, Mounting=SurfaceMount, Mounting Technology=SurfaceMount, Number of  Elements=1, Packaging=TapeandReel, Peak Wavelength=630nm, Pin Count=2, Product Depth (mm)=0.8mm, Product Height (mm)=0.8mm, Product Length (mm)=1.6mm, Rad Hardened=No, Shape Type=Rectangular, Type=Uni-Color, Viewing Angle=170deg
J1: library part CMP-2000-05500-1, "Female D-Sub Connector, Pitch 2.77 mm, 9 Position, Height 12.75 mm, Tail Length 3.2 mm, -55 to 105 degC, RoHS, Tray", Color=Black, Current Rating=2A, Manufacturer="TE Connectivity", Operating Temperature=-55°C~105°C, Package Description="Female D-Sub Connector, Pitch 2.77 mm, 9 Position, Height 12.75 mm, Tail Length 3.2 mm", Standard Package=90, Voltage Rating=250V, 3D Model=1734354-2.pdf, Catalog Drawings=AMPD-SubMale.318, Category=Connectors,Interconnects, Connector Style=D-Sub, Connector Type=Receptacle,FemaleSockets, Contact Finish=Gold, Contact Finish Thickness=15µin(0.38µm), Contact Type=Signal, Datasheet URL=http://www.te.com/commerce/DocumentDelivery/DDEController?Action=showdoc&DocId=Customer+Drawing%7F1734354%7FA1%7Fpdf%7FEnglish%7FENG_CD_1734354_A1.pdf%7F1734354-2, Datasheet Version="Rev. A1, 03/2011", Dynamic Catalog=AMPLIMITEHD-20Series, Family=D-SubConnectors, Featured Product=AMPLIMITED-SubminiatureConnectors, Features=BoardLock, Flange Feature=MatingSide;FemaleScrewlock(4-40), Housing Material=Polyamide(PA9T),Nylon9T,GlassFilled, Manufacturer URL=http://www.te.com/, Mating Products="AML09B-ND / -CONND-SUBPLUG9POSGOLD", Mounting Technology=ThroughHole, Mounting Type=ThroughHole,RightAngle, Number of Positions=9, Number of Rows=2, Other Names=A35108, Package Reference=1734354-2, Product Training Modules=AMPLIMITED-SubConnectors, RoHS Information=1734354-2StatementofCompliance, Series=AMPLIMITEHD-20, Shell Material, Finish=Steel,NickelPlated, Shell Size, Connector Layout=1(DE,E), Termination=Solder
P1: library part CMP-2000-07625-1, "High Density Plug, Pitch 2.29 mm, 26 Position, Height 12.88 mm, Tail Length 3.18 mm, -55 to 105 degC, RoHS, Tray", Case\/Package=Metal, Colour=Black, Current Rating=2A, Flammability Rating=UL94V-0, Manufacturer=TEConnectivity, Max Operating Temperature=105degC, Max Voltage Rating (AC)=250V, Min Operating Temperature=-55degC, Package Description="High Density Plug, Pitch 2.29 mm, 26 Position, Height 12.88 mm, Tail Length 3.18 mm", Voltage Rating=125V, Approvals=UL, Body Material=Metal, Contact Plating=Gold, Datasheet URL=https://media.digikey.com/pdf/Data%20Sheets/Tyco%20Electonics%20AMP%20PDFs/5749769_Dwg.pdf, Datasheet Version="Rev. B2, 12/2015", ELV=Compliant, Gender=Male, Insulation Material=Thermoplastic, Lead Free=LeadFree, Manufacturer URL=http://www.te.com/, Material=Metal, Mount=ThroughHole, Mounting Technology=ThroughHole, Number of Terminals=26, Package Reference=5749769-1, Plating=Nickel, Radiation Hardening=No, REACH SVHC=Unknown, RoHSCompliant=true
P2: "Header, 2-Pin", LatestRevisionDate=17-Jul-2002, LatestRevisionNote="Re-released for DXP Platform.", Publisher="Altium Limited"
R1 R2 R3 R4 R5 R6 R7 R8 R9 R10 R11 R40 R47 R53 R58 R68 R70 R72 R76: library part "Resistor EU"
R39 R51 R60 R69: library part "Resistor EU", "Res Thick Film 0603 2K Ohm 5% 0.25W(1/4W) ±200ppm/C Sulfur Resistant Pad SMD Automotive T/R", Manufacturer=Panasonic, Manufacturer Part Number=ERJ-UP3J202V, Supplier Part Number 1=10-ERJ-UP3J202VCT-ND, ComponentLink1Description=http://datasheet.octopart.com/ERJ-UP3J202V-Panasonic-datasheet-145548814.pdf?src-supplier=Electro+Sonic, ComponentLink1URL=http://datasheet.octopart.com/ERJ-UP3J202V-Panasonic-datasheet-145548814.pdf?src-supplier=Electro+Sonic, ComponentLink2Description=http://datasheet.octopart.com/ERJUP3J202V-Panasonic-datasheet-102570939.pdf?src-supplier=Panasonic+SCT, ComponentLink2URL=http://datasheet.octopart.com/ERJUP3J202V-Panasonic-datasheet-102570939.pdf?src-supplier=Panasonic+SCT, Pricing 1="1=0,16000, 10=0,13900, 100=0,05440, 1000=0,02277, 2500=0,02087 (USD)", Stock 1=4885, Supplier 1=Digi-Key
R41 R44 R48 R54 R55 R61 R65 R73: library part "Resistor EU", "Res Thick Film 0603 20K Ohm 1% 0.25W(1/4W) ±100ppm/C Sulfur Resistant Pad SMD Automotive T/R", Case Code (Imperial)=0603, Case Code (Metric)=1608, Manufacturer=Panasonic, Manufacturer Part Number=ERJ3RBD2002V, Max Operating Temperature=125°C, Min Operating Temperature=-55°C, Package Quantity=5000, Power Rating=100mW, Resistance=20kR, Resistor Type="Thick Film", Temperature Coefficient=50ppm/°C, Tolerance=0.5%, Voltage Rating=50V, Case/Package=0603, Category="Chip SMD Resistors", ComponentLink1Description=https://datasheet.ciiva.com/28688/1678782-28688535.pdf?src-supplier=Element14, ComponentLink1URL=https://datasheet.ciiva.com/28688/1678782-28688535.pdf?src-supplier=Element14, ComponentLink2Description=http://datasheet.octopart.com/ERJ-UP3F2002V-Panasonic-datasheet-145548814.pdf?src-supplier=Electro+Sonic, ComponentLink2URL=http://datasheet.octopart.com/ERJ-UP3F2002V-Panasonic-datasheet-145548814.pdf?src-supplier=Electro+Sonic, ComponentLink3Description=http://datasheet.octopart.com/ERJUP3F2002V-Panasonic-datasheet-102570939.pdf?src-supplier=Panasonic+SCT, ComponentLink3URL=http://datasheet.octopart.com/ERJUP3F2002V-Panasonic-datasheet-102570939.pdf?src-supplier=Panasonic+SCT, Depth=0.8mm, Height=0.45mm, Length=1.6mm, Mount="Surface Mount", Packaging="Tape and Reel", Pricing 1="100=0,03800, 2500=0,03600 (USD)", Pricing 2="10=0,21500, 100=0,06600, 500=0,04830, 1000=0,03050, 2500=0,02850, 5000=0,02700, 25000=0,02590 (GBP)", REACH SVHC="No SVHC", RoHS=Yes, Stock 1=88968, Stock 2=5000, Supplier 1=RSComponents, Supplier 2=Farnell, Supplier Part Number 2=3579680, Termination=SMD/SMT, Voltage Rating (DC)=50V, Width=0.8mm
R42 R52 R64 R71: library part "Resistor EU", "Res Thick Film 0603 22K Ohm 1% 0.25W(1/4W) ±100ppm/C Sulfur Resistant Pad SMD Automotive T/R", Manufacturer=Panasonic, Manufacturer Part Number=ERJ-UP3F2202V, Supplier Part Number 1=10-ERJ-UP3F2202VCT-ND, ComponentLink1Description=http://datasheet.octopart.com/ERJ-UP3F2202V-Panasonic-datasheet-145548814.pdf?src-supplier=Electro+Sonic, ComponentLink1URL=http://datasheet.octopart.com/ERJ-UP3F2202V-Panasonic-datasheet-145548814.pdf?src-supplier=Electro+Sonic, ComponentLink2Description=http://datasheet.octopart.com/ERJUP3F2202V-Panasonic-datasheet-102570939.pdf?src-supplier=Panasonic+SCT, ComponentLink2URL=http://datasheet.octopart.com/ERJUP3F2202V-Panasonic-datasheet-102570939.pdf?src-supplier=Panasonic+SCT, Pricing 1="1=0,25000, 10=0,21000, 100=0,08210, 1000=0,03436, 2500=0,03150 (USD)", Stock 1=4880, Supplier 1=Digi-Key
R43 R59: library part "Resistor EU", "Res Thick Film 0603 910 Ohm 1% 0.25W(1/4W) ±100ppm/C Sulfur Resistant Pad SMD Automotive T/R", Manufacturer=Panasonic, Manufacturer Part Number=ERJ-UP3F9100V, Supplier Part Number 1=10-ERJ-UP3F9100VCT-ND, ComponentLink1Description=http://datasheet.octopart.com/ERJ-UP3F9100V-Panasonic-datasheet-145548814.pdf?src-supplier=Electro+Sonic, ComponentLink1URL=http://datasheet.octopart.com/ERJ-UP3F9100V-Panasonic-datasheet-145548814.pdf?src-supplier=Electro+Sonic, ComponentLink2Description=http://datasheet.octopart.com/ERJUP3F9100V-Panasonic-datasheet-102570939.pdf?src-supplier=Panasonic+SCT, ComponentLink2URL=http://datasheet.octopart.com/ERJUP3F9100V-Panasonic-datasheet-102570939.pdf?src-supplier=Panasonic+SCT, Pricing 1="1=0,25000, 10=0,21000, 100=0,08210, 1000=0,03436, 2500=0,03150 (USD)", Stock 1=3975, Supplier 1=Digi-Key
R45 R56 R66 R74: library part "Resistor EU", "Res Thick Film 0603 4.3K Ohm 1% 0.25W(1/4W) ±100ppm/C Sulfur Resistant Pad SMD Automotive T/R", Manufacturer=Panasonic, Manufacturer Part Number=ERJ-UP3F4301V, Supplier Part Number 1=10-ERJ-UP3F4301VCT-ND, ComponentLink1Description=http://datasheet.octopart.com/ERJ-UP3F4301V-Panasonic-datasheet-145548814.pdf?src-supplier=Electro+Sonic, ComponentLink1URL=http://datasheet.octopart.com/ERJ-UP3F4301V-Panasonic-datasheet-145548814.pdf?src-supplier=Electro+Sonic, ComponentLink2Description=http://datasheet.octopart.com/ERJUP3F4301V-Panasonic-datasheet-102570939.pdf?src-supplier=Panasonic+SCT, ComponentLink2URL=http://datasheet.octopart.com/ERJUP3F4301V-Panasonic-datasheet-102570939.pdf?src-supplier=Panasonic+SCT, Pricing 1="1=0,25000, 10=0,21000, 100=0,08210, 1000=0,03436, 2500=0,03150 (USD)", Stock 1=4670, Supplier 1=Digi-Key
R46 R57 R67 R75: library part "Resistor EU", "Res Thick Film 0603 1.2K Ohm 1% 0.25W(1/4W) ±100ppm/C Sulfur Resistant Pad SMD Automotive T/R", Manufacturer=Panasonic, Manufacturer Part Number=ERJ-UP3F1201V, Supplier Part Number 1=10-ERJ-UP3F1201VCT-ND, ComponentLink1Description=http://datasheet.octopart.com/ERJ-UP3F1201V-Panasonic-datasheet-145548814.pdf?src-supplier=Electro+Sonic, ComponentLink1URL=http://datasheet.octopart.com/ERJ-UP3F1201V-Panasonic-datasheet-145548814.pdf?src-supplier=Electro+Sonic, ComponentLink2Description=http://datasheet.octopart.com/ERJUP3F1201V-Panasonic-datasheet-102570939.pdf?src-supplier=Panasonic+SCT, ComponentLink2URL=http://datasheet.octopart.com/ERJUP3F1201V-Panasonic-datasheet-102570939.pdf?src-supplier=Panasonic+SCT, Pricing 1="1=0,25000, 10=0,21000, 100=0,08210, 1000=0,03436, 2500=0,03150 (USD)", Stock 1=2581, Supplier 1=Digi-Key
R49 R62: library part "Resistor EU", "Res Thick Film 0603 6.2K Ohm 1% 0.25W(1/4W) ±100ppm/C Sulfur Resistant Pad SMD Automotive T/R", Manufacturer=Panasonic, Manufacturer Part Number=ERJ-UP3F6201V, Supplier Part Number 1=10-ERJ-UP3F6201VCT-ND, ComponentLink1Description=http://datasheet.octopart.com/ERJ-UP3F6201V-Panasonic-datasheet-145548814.pdf?src-supplier=Electro+Sonic, ComponentLink1URL=http://datasheet.octopart.com/ERJ-UP3F6201V-Panasonic-datasheet-145548814.pdf?src-supplier=Electro+Sonic, ComponentLink2Description=http://datasheet.octopart.com/ERJUP3F6201V-Panasonic-datasheet-102570939.pdf?src-supplier=Panasonic+SCT, ComponentLink2URL=http://datasheet.octopart.com/ERJUP3F6201V-Panasonic-datasheet-102570939.pdf?src-supplier=Panasonic+SCT, Pricing 1="1=0,25000, 10=0,21000, 100=0,08210, 1000=0,03436, 2500=0,03150 (USD)", Stock 1=4695, Supplier 1=Digi-Key
R50 R63: library part "Resistor EU", "Res Thick Film 0603 820 Ohm 1% 0.25W(1/4W) ±100ppm/C Sulfur Resistant Pad SMD Automotive T/R", Manufacturer=Panasonic, Manufacturer Part Number=ERJ-UP3F8200V, Supplier Part Number 1=10-ERJ-UP3F8200VCT-ND, ComponentLink1Description=http://datasheet.octopart.com/ERJ-UP3F8200V-Panasonic-datasheet-145548814.pdf?src-supplier=Electro+Sonic, ComponentLink1URL=http://datasheet.octopart.com/ERJ-UP3F8200V-Panasonic-datasheet-145548814.pdf?src-supplier=Electro+Sonic, ComponentLink2Description=http://datasheet.octopart.com/ERJUP3F8200V-Panasonic-datasheet-102570939.pdf?src-supplier=Panasonic+SCT, ComponentLink2URL=http://datasheet.octopart.com/ERJUP3F8200V-Panasonic-datasheet-102570939.pdf?src-supplier=Panasonic+SCT, Pricing 1="1=0,25000, 10=0,21000, 100=0,08210, 1000=0,03436, 2500=0,03150 (USD)", Stock 1=4900, Supplier 1=Digi-Key
S1: "DIP Switch, 4 Position, SPST", Code_IPC=SOIC127P600-8, Code_JEDEC=MS-012-AA, LatestRevisionDate=29-May-2009, LatestRevisionNote="IPC-7351 Footprint Added.", PackageDescription="8-Pin Small Outline Integrated Circuit 1.27 mm Pitch", PackageReference=SO8, PackageVersion=Dec-2002, Published=24-Mar-1999, Publisher="Altium Limited"
U1: "No Description Available", Built_By=EMA_UL_Team, Copyright="Copyright (C) 2018 Accelerated Designs. All rights reserved", Manufacturer_Part_Number=AD2S1210ASTZ, RefDes=RefDes, SourceLibrary=Analog_2015-12-15, Type=DEV, Vendor="Analog Devices Inc"
U2: library part CMP-0384-00552-1, "Double Channel Low Noise Operational Amplifier, 69 MHz BW, 53 V/us SR, Industrial, 8-pin SOIC (R-8), Tube", Amplifiers Per Package=2, Generic Part Number=AD8397, Input Bias Current=200nA, Input Offset Voltage=1mV, Manufacturer="Analog Devices", Code_JEDEC=MS-012-AA, ComponentLink1Description="Manufacturer URL", ComponentLink1URL=http://www.analog.com/en/index.html, ComponentLink2Description=Datasheet, ComponentLink2URL=http://www.analog.com/static/imported-files/data_sheets/AD8397.pdf, ComponentLink3Description="Package Specification", ComponentLink3URL=http://www.analog.com/static/imported-files/packages/PKG_PDF/SOIC_Narrow%20(R)/R_8.pdf, DatasheetVersion="Rev. A", Iq/Amp=15mA, Mounting Technology="Surface Mount", PackageDescription="8-Pin Standard Small Outline Package, Body 3.9 x 4.9 mm, Pitch 1.27 mm", PackageReference=R-8, PackageVersion=060506-A, PartNumber=AD8397ARZ, Slew Rate=53V/us, Small Signal Bandwidth=69MHz, V Span Max=24V, V Span Min=3V
U3: library part CMP-0384-01750-1, "Double Channel Wide Bandwidth Operational Amplifier, 10 MHz BW, 5 V/us SR, Industrial, 8-pin SOP (RM-8), Reel", Amplifiers Per Package=2, Generic Part Number=AD8692, Input Bias Current=200fA, Input Offset Voltage=400uV, Manufacturer="Analog Devices", Automotive Qualified=Yes, Code_JEDEC=MO-187-AA, ComponentLink1Description="Manufacturer URL", ComponentLink1URL=http://www.analog.com/en/index.html, ComponentLink2Description=Datasheet, ComponentLink2URL=http://www.analog.com/static/imported-files/data_sheets/AD8691_8692_8694.pdf, ComponentLink3Description="Package Specification", ComponentLink3URL=http://www.analog.com/static/imported-files/packages/PKG_PDF/MSOP%28RM%29/RM_8.pdf, DatasheetVersion="Rev. E", Iq/Amp=1.05mA, Mounting Technology="Surface Mount", PackageDescription="8-Pin Mini Small Outline Package, Body 3 x 3 mm, Pitch 0.65 mm", PackageReference=RM-8, PartNumber=AD8692ARMZ-R7, Slew Rate=5V/us, Small Signal Bandwidth=10MHz, V Span Max=6V, V Span Min=2.7V
U4 U5: library part CMP-0384-00447-1, "Quad Channel Wide Bandwidth Operational Amplifier, 10 MHz BW, 5 V/us SR, Industrial, 14-pin SOIC (R-14), Tube", Amplifiers Per Package=4, Generic Part Number=AD8694, Input Bias Current=200fA, Input Offset Voltage=400uV, Manufacturer="Analog Devices", Automotive Qualified=Yes, Code_JEDEC=MS-012-AB, ComponentLink1Description="Manufacturer URL", ComponentLink1URL=http://www.analog.com/en/index.html, ComponentLink2Description=Datasheet, ComponentLink2URL=http://www.analog.com/static/imported-files/data_sheets/AD8691_8692_8694.pdf, ComponentLink3Description="Package Specification", ComponentLink3URL=http://www.analog.com/static/imported-files/packages/PKG_PDF/SOIC_Narrow%20(R)/R_14.pdf, DatasheetVersion="Rev. E", Iq/Amp=1.2mA, Mounting Technology="Surface Mount", PackageDescription="14-Pin Standard Small Outline Package, Body 8.65 x 3.9 mm, Pitch 1.27 mm", PackageReference=R-14, PackageVersion=060606-A, PartNumber=AD8694ARZ, Slew Rate=5V/us, Small Signal Bandwidth=10MHz, V Span Max=6V, V Span Min=2.7V
U6 U7: library part CMP-12153-000005-1, "IC REG LINEAR 5V 1.2A SOT223", Dropout Voltage=350mV, Manufacturer=STMicroelectronics, Max Junction Temp=+150°C, Max Supply Voltage=18V, Min Supply Voltage=2.6V, Nominal Supply Current=250uA, Output Current=2A, Output Voltage=5V, Package=SOT-223-0046067_14, Temperature="-40°C to +125°C", Temperature Range High=+125°C, Temperature Range Low=-40°C, Accuracy Percentage=2%, Automotive=No, Category=IC, ComponentLink2Description=Datasheet, ComponentLink2URL=https://www.st.com/content/ccc/resource/technical/document/datasheet/group3/0e/5a/00/ca/10/1a/4f/a5/DM00366442/files/DM00366442.pdf/jcr:content/translations/en.DM00366442.pdf, Device Class L1="Integrated Circuits (ICs)", Device Class L2="Power Management ICs", Device Class L3="Voltage Regulators - Linear", Digikey Description="IC REG LINEAR 5V 1.2A SOT223", Height=1.9mm, Lead Free=Yes, Manufacturer Part Number=LDL1117S50R, Mouser Description="LDL1117 Series 1.2 A 5 V High PSRR LDO Linear Voltage Regulator - SOT-223", Number Of Outputs=1, Octopart=https://octopart.com/ldl1117s50r-stmicroelectronics-81876164, Output Type=Fixed, RoHS=TRUE, Standoff Height=0.02mm
U8: library part CMP-0244-00351-1, "150 mA Low Quiescent Current Low Noise Voltage Regulator, 3.3V, 5-Pin SOT-23, Tape and Reel", ComponentLink1Description="Manufacturer URL", ComponentLink1URL=http://www.st.com, ComponentLink2Description=Datasheet, ComponentLink2URL=http://www.st.com/internet/com/TECHNICAL_RESOURCES/TECHNICAL_LITERATURE/DATASHEET/CD00173477.pdf, DatasheetVersion=1/02/2009, PackageDescription="5-Pin SOT-23 Package, 2.9 x 1.6 mm Body, 0.95 mm Pitch, 2.8 mm Lead Span", PackageReference=SOT23-5L, PackageVersion=1/01/2008
X1: library part CMP-2000-05730-1, "Ceramic Crystal, 8 MHz, +/- 10 ppm, -10 to 60 degC, 4-Pin SMD, RoHS, Tape and Reel", ESR (Equivalent Series Resistance)=200Ohm, Frequency=8MHz, Frequency Stability=±10ppm, Load Capacitance=10pF, Manufacturer=Abracon-LLC, Operating Mode=Fundamental, Operating Temperature=-10°C~60°C, Package / Case=4-SMD,NoLead(DFN,LCC), Package Description="4-Pin Surface Mount Device, Body 5 x 3.2 mm", Package Reference=ABM3B, Ratings=-, Category=CrystalsandOscillators, Datasheet URL=http://www.abracon.com/Resonators/abm3b.pdf, Datasheet Version=08/2015, Family=Crystals, Frequency Tolerance=±10ppm, Height="0.043\"(1.10mm)", Manufacturer URL=http://www.abracon.com/, Mounting Technology=SurfaceMount, Mounting Type=SurfaceMount, Packaging=Tape&amp;Reel(TR), Series=ABM3B, Size / Dimension="0.197\"Lx0.126\"W(5.00mmx3.20mm)", Type=MHzCrystal

## Via types
v1: diameter 0.62, hole 0.32, Top Layer to Bottom Layer, 54 vias
v2: diameter 1.27, hole 0.711, Top Layer to Bottom Layer, 1 vias

## Nets (pads, with @x,y where several pads share a name; then routed paths per layer and width w, separated by ;. In a path a pad name is that pad's centre, name@x,y a point inside that pad or via, vN(x,y) a via of type N, cw(c..) or ccw(c..) an arc to the next point about the centre after c; other vN are vias at no path point)
*EXC: R48.1 U1.39 | length 18.9
  Top Layer w0.3: R48.1 83.292,86.264 83.459,86.264 83.518,86.205 U1.39
*RD: U1.3
*SAMPLE: U1.10
*SOE: P1.7 U1.9
*WR/*FSYNC: U1.4
+2v5: U1.47 U3.3 U3.5 | length 39.8
  Top Layer w0.29: U3.3 79.076,93.562 79.726,94.212 ; U3.5 79.726,94.212 ; v1(81.915,92.075) 81.862,92.075 79.726,94.212 ; U1.47 101.657,82.2 103.22,82.2 v1(103.251,82.169)
  Bottom Layer w0.29: v1(81.915,92.075) 88.265,92.075 90.678,89.662 90.678,86.146 97.449,79.375 101.854,79.375 102.362,79.883 102.362,80.899 103.205,81.742 103.205,82.123 v1(103.251,82.169)
+3v3: C8.2 C12.2 R1.2 R10.2 R11.2 S1.1 S1.2 S1.3 S1.4 U1.18 U8.5 | length 53.3
  Top Layer w0.29: S1.4 88.392,95.16 88.392,96.266 88.392,97.536 88.392,98.806 88.392,100.838 90.043,102.489 104.255,102.489 105.029,101.715 105.029,96.901 106.68,95.25 R1.2 107.685,93.737 107.95,93.472 107.95,90.467 108.12,90.297 111.186,90.297 ; U1.18 110.179,84.2 110.168,84.21 109.124,84.21 108.585,84.749 v1(108.585,86.487) 108.585,87.119 111.186,89.72 111.186,90.297 ; U8.5 111.186,90.297 ; U8.5 111.391,91.843 C12.2
  Bottom Layer w0.29: C8.2@107.235,86.705 C8.2 107.453,86.487 v1(108.585,86.487)
+5VA: C5.2 C6.2 C18.2 C20.1 C24.2 C25.2 C26.2 R70.2 U1.43 U3.8 U4.4 U5.4 U6.2 U6.4 | length 50.1
  Top Layer w0.29: U4.4 v1(66.421,74.295) C25.2 C25.2@68.061,74.422 ; C26.2 74.844,94.529 75.568,94.529 76.285,95.246 v1(76.374,95.246) 77.125,95.997 U3.8 ; v1(85.598,90.17) R70.2 87.365,92.191 C18.2 ; U5.4 v1(90.551,74.295) C24.2 ; C20.1 108.762,104.521 U6.4 U6.2 108.839,97.894 107.505,96.56 107.505,96.456 v1(107.442,96.393) ; U1.43 101.654,84.203 103.249,84.203 v1(103.251,84.201)
  Bottom Layer w0.29: C6.2 101.716,84.201 v1(103.251,84.201) 103.303,84.253 103.303,92.254 v1(107.442,96.393) ; v1@103.314,84.264 103.618,84.264 104.267,84.913 C5.2
+5VD: C7.2 C10.2 C11.2 C21.1 U1.6 U7.2 U7.4 U8.1 U8.3 | length 57.7
  Top Layer w0.3: v1(105.664,81.788) 105.666,81.786 105.666,80.191 U1.6 105.668,78.49 103.759,76.581 103.759,70.866 105.918,68.707 108.458,68.707 C21.1 114.656,68.58 U7.4 ; v1(107.95,94.742) 108.655,94.037 U8.3 109.286,93.033 109.462,92.857 111.01,92.857 111.186,93.033 U8.1 113.216,94.037 C11.2 ; C10.2 116.917,63.627 114.783,65.761 U7.4 ; U7.2 U7.4
  Bottom Layer w0.3: C7.2 105.992,83.408 106.123,83.408 106.299,83.584 106.299,93.091 v1(107.95,94.742) ; v1(105.664,81.788) C7.2@105.664,83.058
+12: C4.2 C9.2 C15.2 C16.2 C17.2 U2.8 U6.3 U7.3 | length 12
  Top Layer w0.3: C17.2 62.51,96.811 C15.2@64.516,96.811 ; C15.2 C15.2@64.516,96.811 ; U2.8 C15.2@64.516,96.811 ; U6.3 113.527,98.044 C4.2 ; U7.3 121.324,70.612 122.235,70.612 123.571,69.276 C9.2
A: DS1.1 P1.1 U1.29
A0: R5.2 S1.8 U1.37 | length 24.4
  Top Layer w0.3: S1.8 94.136,98.806 94.517,99.187 R5.2 v1(103.759,97.536) ; U1.37 102.098,87.205 102.108,87.215 v1(102.108,93.98)
  Bottom Layer w0.3: v1(102.108,93.98) 102.108,96.734 102.91,97.536 v1(103.759,97.536)
A1: R4.2 S1.7 U1.36 | length 17.3
  Top Layer w0.3: S1.7 94.136,97.536 94.39,97.79 R4.2@99.673,97.79 ; R4.2 99.723,97.917 103.168,94.472 U1.36
B: DS2.1 P1.2 U1.30
CLKIN: C2.2 U1.7 X1.3 | length 6.5
  Top Layer w0.254: C2.2 105.41,75.499 105.783,75.872 105.833,75.872 106.474,76.513 107.202,76.513 X1.3 107.29,76.633 107.29,77.749 106.168,78.871 U1.7
COS: R76.2 U1.45 | length 32.1
  Top Layer w0.3: R76.2 85.99,67.045 87.376,65.659 94.107,65.659 97.79,69.342 97.79,81.915 99.07,83.195 101.641,83.195 U1.45
COSLO: R47.2 U1.44 | length 27.1
  Top Layer w0.3: R47.2 94.107,66.675 97.155,69.723 97.155,82.169 98.691,83.705 U1.44
DB0: P1.10 U1.28
DB1: P1.19 U1.27
DB2: P1.11 U1.26
DB3: P1.20 U1.25
DB4: P1.12 U1.24
DB5: P1.21 U1.23
DB6: P1.13 U1.22
DB7: P1.22 U1.21
DB8: P1.14 U1.20
DB9: P1.23 U1.17
DB10: P1.15 U1.16
DB11: P1.24 U1.15
DB12: P1.16 U1.14
DB13: P1.25 U1.13
DB14: P1.17 U1.12
DB15: P1.26 U1.11
DIR: DS4.1 P1.3 U1.32
DOS: DS6.2 P1.4 U1.35
EXC: R61.1 U1.38 | length 31.1
  Top Layer w0.3: R61.1 81.048,97.768 83.36,95.456 83.36,90.122 86.777,86.705 U1.38
GND: C1.1 C2.1 C3.1 C4.1 C5.1 C6.1 C7.1 C8.1 C9.1 C10.1 C11.1 C12.1 C13.1 C14.1 C15.1 C16.1 C17.1 C18.1 C19.1 C20.2 C21.2 C24.1 C25.1 C26.1 C45.2 C46.1 C47.2 C51.2 C55.1 C56.1 C57.2 C60.2 J1.MH1 J1.MH2 P1.MH1 P1.MH2 R2.1 R3.1 R4.1 R5.1 R6.2 R7.2 R8.2 R9.2 R40.2 R53.2 R72.1 U1.2 U1.5 U1.19 U1.40 U2.4 U3.4 U4.11 U5.11 U6.1 U7.1 U8.2 X1.2 X1.4 | length 122.6